# EAGLE board CT_schematic (EAGLE 7.6.0)

Size 100 x 80 mm. Coordinates in mm from the lower left corner, seen from the top.
Outline: 0,0 100,0 100,80 0,80 0,0
Copper layers (1*16): Top 0.035mm / dielectric 1.5mm / Bottom 0.035mm
Design rules "default": minimum track width 10mil, minimum drill 24mil, track to track 8mil, track to pad 8mil, pad to pad 8mil, via to via 8mil, smd to smd 8mil, copper to edge 40mil, drill to drill 8mil, minimum pad ring 10mil, minimum via ring 8mil, stop-mask expansion 4mil, vias tented up to drill 0mil, thermal gap 10mil

## Footprints (pad centres in the part's own frame; a part is rotated, then mirrored left to right if it is on the bottom)
C0603 = smd 0.8 x 0.8: 1 -0.762,0; 2 0.762,0
C0402 = smd 0.5 x 0.5: 1 -0.508,0; 2 0.508,0
C0805 = smd 1.2 x 1.3: 1 -1.016,0; 2 1.016,0
C1206 = smd 1.3 x 1.6: 1 -1.524,0; 2 1.524,0
EXV-9H = smd 3.505 x 1.676: 1 -2.857,0; 2 2.857,0
L0603 = smd 0.8 x 0.8: 1 -0.762,0; 2 0.762,0
PJ-037B_PACKAGE = drill 3.7 square: 1 12,0 | drill 3.2 square: 2 6,0
R0603 = smd 0.8 x 0.8: 1 -0.762,0; 2 0.762,0
UFQFPN48 = smd 0.559 x 0.305: 1 -3.375,2.751; 2 -3.375,2.251; 3 -3.375,1.75; 4 -3.375,1.25; 5 -3.375,0.75; 6 -3.375,0.25; 7 -3.375,-0.25; 8 -3.375,-0.75; 9 -3.375,-1.25; 10 -3.375,-1.75; 11 -3.375,-2.251; 12 -3.375,-2.751; 25 3.375,-2.751; 26 3.375,-2.251; 27 3.375,-1.75; 28 3.375,-1.25; 29 3.375,-0.75; 30 3.375,-0.25; 31 3.375,0.25; 32 3.375,0.75; 33 3.375,1.25; 34 3.375,1.75; 35 3.375,2.251; 36 3.375,2.751 | smd 0.305 x 0.559: 13 -2.751,-3.375; 14 -2.251,-3.375; 15 -1.75,-3.375; 16 -1.25,-3.375; 17 -0.75,-3.375; 18 -0.25,-3.375; 19 0.25,-3.375; 20 0.75,-3.375; 21 1.25,-3.375; 22 1.75,-3.375; 23 2.251,-3.375; 24 2.751,-3.375; 37 2.751,3.375; 38 2.251,3.375; 39 1.75,3.375; 40 1.25,3.375; 41 0.75,3.375; 42 0.25,3.375; 43 -0.25,3.375; 44 -0.75,3.375; 45 -1.25,3.375; 46 -1.75,3.375; 47 -2.251,3.375; 48 -2.751,3.375 | smd 5.588 x 5.588: 49 0,0
TST-110-05-T-D-RA = drill 1 pad 1.7 square: 1 0,0 | drill 1 pad 1.7: 2 0,2.54; 3 2.54,0; 4 2.54,2.54; 5 5.08,0; 6 5.08,2.54; 7 7.62,0; 8 7.62,2.54; 9 10.16,0; 10 10.16,2.54; 11 12.7,0; 12 12.7,2.54; 13 15.24,0; 14 15.24,2.54; 15 17.78,0; 16 17.78,2.54; 17 20.32,0; 18 20.32,2.54; 19 22.86,0; 20 22.86,2.54
M41T65_QFN-16 = smd 0.775 x 0.305: 1 -1.387,0.75; 2 -1.387,0.25; 3 -1.387,-0.25; 4 -1.387,-0.75; 9 1.387,-0.75; 10 1.387,-0.25; 11 1.387,0.25; 12 1.387,0.75 | smd 0.305 x 0.775: 5 -0.75,-1.387; 6 -0.25,-1.387; 7 0.25,-1.387; 8 0.75,-1.387; 13 0.75,1.387; 14 0.25,1.387; 15 -0.25,1.387; 16 -0.75,1.387 | smd 1.6 x 1.6: 17 0,0
ABS07-32.768KHZ-7-T = smd 1.1 x 2.4: 1 -2.5,0; 2 0,0
ASEK = smd 1.4 x 1: 1 -1.1,-0.8; 2 1.1,-0.8; 3 1.1,0.8; 4 -1.1,0.8
ASDMB-XX.XXXXMHZ-XX-XX-XXX = smd 0.65 x 0.85: 1 0.45,0.2; 2 2.05,0.2; 3 2.05,1.8; 4 0.45,1.8
WSON-8 = smd 0.3 x 0.6: 1 -0.75,0; 2 0.05,0; 3 0.85,0; 4 1.65,0; 5 1.65,3.8; 6 0.85,3.8; 7 0.05,3.8; 8 -0.75,3.8 | smd 3 x 2.6: PAD 0.45,1.9
SON-6 = smd 0.55 x 0.3: 1 -0.355,0.5 | smd 0.52 x 0.3: 2 -0.37,0; 3 -0.37,-0.5; 4 0.37,-0.5; 5 0.37,0; 6 0.37,0.5
SW_4-1437565-2 = smd 1.4 x 2.1: 1 -2.23,4.55; 2 -2.23,-4.55; 3 2.23,4.55; 4 2.23,-4.55
LGM67K-G1J2-24-Z = smd 0.8 x 1.4: A -2,0; C 0,0
NC7SZ125M5X = smd 1.3 x 0.7: 1 -1.3,0.95; 2 -1.3,0; 3 -1.3,-0.95; 4 1.3,-0.95; 5 1.3,0.95
DUMMY_PACKAGE_115 = drill 0.3: 1 0,-1; 2 1.5,-1

## Placement (x,y rotation side)
C1  1e-06  [C0603]  -38.1,62.23 0 top  (outside the outline)
C2  1e-07  [C0603]  -41.91,62.23 0 top  (outside the outline)
C3  1e-07  [C0603]  -45.72,62.23 0 top  (outside the outline)
C4  1e-07  [C0603]  -49.53,62.23 0 top  (outside the outline)
C5  4.7e-06  [C0603]  -34.29,62.23 0 top  (outside the outline)
C6  1e-07  [C0603]  -53.34,62.23 0 top  (outside the outline)
C7  1e-07  [C0603]  -57.15,62.23 0 top  (outside the outline)
C8  1e-08  [C0603]  -60.96,62.23 0 top  (outside the outline)
C9  1e-06  [C0603]  -15.24,67.31 0 top  (outside the outline)
C10  1e-07  [C0402]  -49.53,67.31 0 top  (outside the outline)
C11  4.7e-06  [C0805]  -15.24,57.15 0 top  (outside the outline)
C12  1e-08  [C0402]  -53.34,67.31 0 top  (outside the outline)
C13  1e-08  [C0402]  -57.15,67.31 0 top  (outside the outline)
C14  1e-08  [C0402]  -60.96,67.31 0 top  (outside the outline)
C15  1e-05  [C1206]  -48.26,49.53 0 top  (outside the outline)
C16  1e-05  [C0805]  -20.32,57.15 0 top  (outside the outline)
C17  1e-07  [C0402]  -15.24,72.39 0 top  (outside the outline)
C18  0.0001  [EXV-9H]  -40.64,43.18 0 top  (outside the outline)
C19  0.0001  [EXV-9H]  -52.07,43.18 0 top  (outside the outline)
C20  1e-08  [C0402]  -19.05,72.39 0 top  (outside the outline)
C21  1e-08  [C0402]  -22.86,72.39 0 top  (outside the outline)
F1  240.0  [L0603]  -19.05,67.31 0 top  (outside the outline)
J1  PJ-037B  [PJ-037B_PACKAGE]  -34.29,7.62 0 top  (outside the outline)
R1  10000.0  [R0603]  -40.64,57.15 0 top  (outside the outline)
R2  1000.0  [R0603]  -22.86,67.31 0 top  (outside the outline)
R3  910.0  [R0603]  -26.67,67.31 0 top  (outside the outline)
R4  4700.0  [R0603]  -30.48,67.31 0 top  (outside the outline)
R5  2200.0  [R0603]  -34.29,67.31 0 top  (outside the outline)
R6  2200.0  [R0603]  -38.1,67.31 0 top  (outside the outline)
R7  10000.0  [R0603]  -45.72,57.15 0 top  (outside the outline)
R8  10000.0  [R0603]  -50.8,57.15 0 top  (outside the outline)
R9  10000.0  [R0603]  -55.88,57.15 0 top  (outside the outline)
R10  10000.0  [R0603]  -60.96,57.15 0 top  (outside the outline)
R11  10000.0  [R0603]  -15.24,62.23 0 top  (outside the outline)
R12  100000.0  [R0603]  -25.4,57.15 0 top  (outside the outline)
R13  806.0  [R0603]  -41.91,67.31 0 top  (outside the outline)
R14  1000.0  [R0603]  -45.72,67.31 0 top  (outside the outline)
R15  10000.0  [R0603]  -20.32,62.23 0 top  (outside the outline)
R16  10000.0  [R0603]  -25.4,62.23 0 top  (outside the outline)
R17  82000.0  [R0603]  -30.48,62.23 0 top  (outside the outline)
R18  300000.0  [R0603]  -30.48,57.15 0 top  (outside the outline)
R19  120000.0  [R0603]  -35.56,57.15 0 top  (outside the outline)
U1  stm32f078cbu7  [UFQFPN48]  -38.1,26.67 0 top  (outside the outline)
U2  TST-110-05-T-D-RA  [TST-110-05-T-D-RA]  -46.99,33.02 0 top  (outside the outline)
U3  M41T65Q6F  [M41T65_QFN-16]  -27.94,72.39 0 top  (outside the outline)
U4  ABS07-32.768KHZ-7-T  [ABS07-32.768KHZ-7-T]  -27.94,50.8 0 top  (outside the outline)
U5  ASEK-2-32.768KHz-ECST  [ASEK]  -31.75,43.18 0 top  (outside the outline)
U6  ASDMB-25.000MHZ-EC-T  [ASDMB-XX.XXXXMHZ-XX-XX-XXX]  -16.51,1.27 0 top  (outside the outline)
U7  LP3878SDX-ADJ/NOPB  [WSON-8]  -30.48,25.4 0 top  (outside the outline)
U8  TPS3895ADRYR  [SON-6]  -36.83,71.12 0 top  (outside the outline)
U9  4-1437565-2  [SW_4-1437565-2]  -50.8,6.35 0 top  (outside the outline)
U10  Q65110A2395  [LGM67K-G1J2-24-Z]  -36.83,50.8 0 top  (outside the outline)
U11  nc7sz125m5x  [NC7SZ125M5X]  -53.34,49.53 0 top  (outside the outline)
U12  nc7sz125m5x  [NC7SZ125M5X]  -59.69,49.53 0 top  (outside the outline)
U13  Dummy  [DUMMY_PACKAGE_115]  -34.29,72.39 0 top  (outside the outline)

## Library data of the parts
C1-C21 F1 J1 R1-R19 U1-U13 = circuit_tree

## Nets
CLK_CRYSTAL_U3_1: U3.1 U4.1
CLK_CRYSTAL_U3_2: U3.2 U4.2
CLK_U1_3: U1.3 U5.3
CLK_U1_5: U1.5 U6.3
GND: C1.2 C2.2 C3.2 C4.2 C5.2 C6.2 C7.2 C8.2 C9.2 C10.2 C11.2 C12.2 C13.2 C14.2 C15.2 C16.2 C17.2 C18.2 C19.2 C20.2 C21.2 J1.2 R2.2 R7.2 R8.2 R14.2 R17.2 R19.2 U1.8 U1.23 U1.35 U1.47 U1.49 U2.4 U2.6 U2.8 U2.10 U2.12 U2.14 U2.16 U2.18 U2.20 U3.3 U3.5 U3.17 U5.2 U6.2 U7.3 U7.PAD U8.2 U10.C U11.2 U11.3 U12.1 U12.3 U13.1
NET_U1_7: R4.1 U1.7 U12.4
NET_U1_9: C8.1 C9.1 F1.1 U1.9
NET_U1_20: R8.1 U1.20
NET_U1_42: R5.1 U1.42 U3.10
NET_U1_43: R6.1 U1.43 U3.9
NET_U1_44: R7.1 U1.44
NET_U1_45: R3.1 U1.45 U10.A
NET_U1_46: R1.1 U1.46 U9.3 U9.4
NET_U3_4: R10.1 U3.4
NET_U3_11: R11.1 U3.11
NET_U7_1: C14.1 U7.1
NET_U7_6: R13.2 R14.1 U7.6
NET_U7_8: R12.1 U7.8
NET_U8_1: R16.1 R17.1 U8.1
NET_U8_3: R18.2 R19.1 U8.3
NET_U8_4: R15.1 U8.4 U11.4 U12.2
NET_U9_1: R2.1 U9.1 U9.2
PROC_DAC_OUT2: U1.15 U13.2
PROC_SYS_SWCLK: U1.37 U2.9
PROC_SYS_SWDIO: U1.34 U2.7
RST_OUT_U2_SRESET_B: R9.1 U2.15 U11.1
VCC_S1_11V0: C15.1 C18.1 C19.1 J1.1 R12.2 U7.4
VCC_TIER1_1V8: C1.1 C2.1 C3.1 C4.1 C5.1 C6.1 C7.1 C10.1 C11.1 C12.1 C13.1 C16.1 C17.1 C20.1 C21.1 F1.2 R1.2 R3.2 R4.2 R5.2 R6.2 R9.2 R10.2 R11.2 R13.1 R15.2 R16.2 R18.1 U1.1 U1.24 U1.36 U1.48 U2.1 U3.14 U5.4 U6.4 U7.5 U8.6 U11.5 U12.5

## Tracks (layer width: path | path; a pad name or v marks a point on that pad's centre or on a via)
CLK_CRYSTAL_U3_1  (1 unrouted)
CLK_CRYSTAL_U3_2  (1 unrouted)
CLK_U1_3  (1 unrouted)
CLK_U1_5  (1 unrouted)
GND  (55 unrouted)
NET_U1_7  (2 unrouted)
NET_U1_9  (3 unrouted)
NET_U1_20  (1 unrouted)
NET_U1_42  (2 unrouted)
NET_U1_43  (2 unrouted)
NET_U1_44  (1 unrouted)
NET_U1_45  (2 unrouted)
NET_U1_46  (3 unrouted)
NET_U3_4  (1 unrouted)
NET_U3_11  (1 unrouted)
NET_U7_1  (1 unrouted)
NET_U7_6  (2 unrouted)
NET_U7_8  (1 unrouted)
NET_U8_1  (2 unrouted)
NET_U8_3  (2 unrouted)
NET_U8_4  (3 unrouted)
NET_U9_1  (2 unrouted)
PROC_DAC_OUT2  (1 unrouted)
PROC_SYS_SWCLK  (1 unrouted)
PROC_SYS_SWDIO  (1 unrouted)
RST_OUT_U2_SRESET_B  (2 unrouted)
VCC_S1_11V0  (5 unrouted)
VCC_TIER1_1V8  (39 unrouted)